# Altium PCB MB1520.PcbDoc (part 2 of 7)
Units mm, origin at the board's own origin, x right, y up, seen from the top; angles counter-clockwise.
Board outline 159 x 88 mm, 6 copper layers (Top Layer, Signal Layer 1, Signal Layer 2, Signal Layer 3, Signal Layer 4, Bottom Layer), stack 1.572 mm thick; 473 components, 377 nets, 1832 pads, 1378 vias.
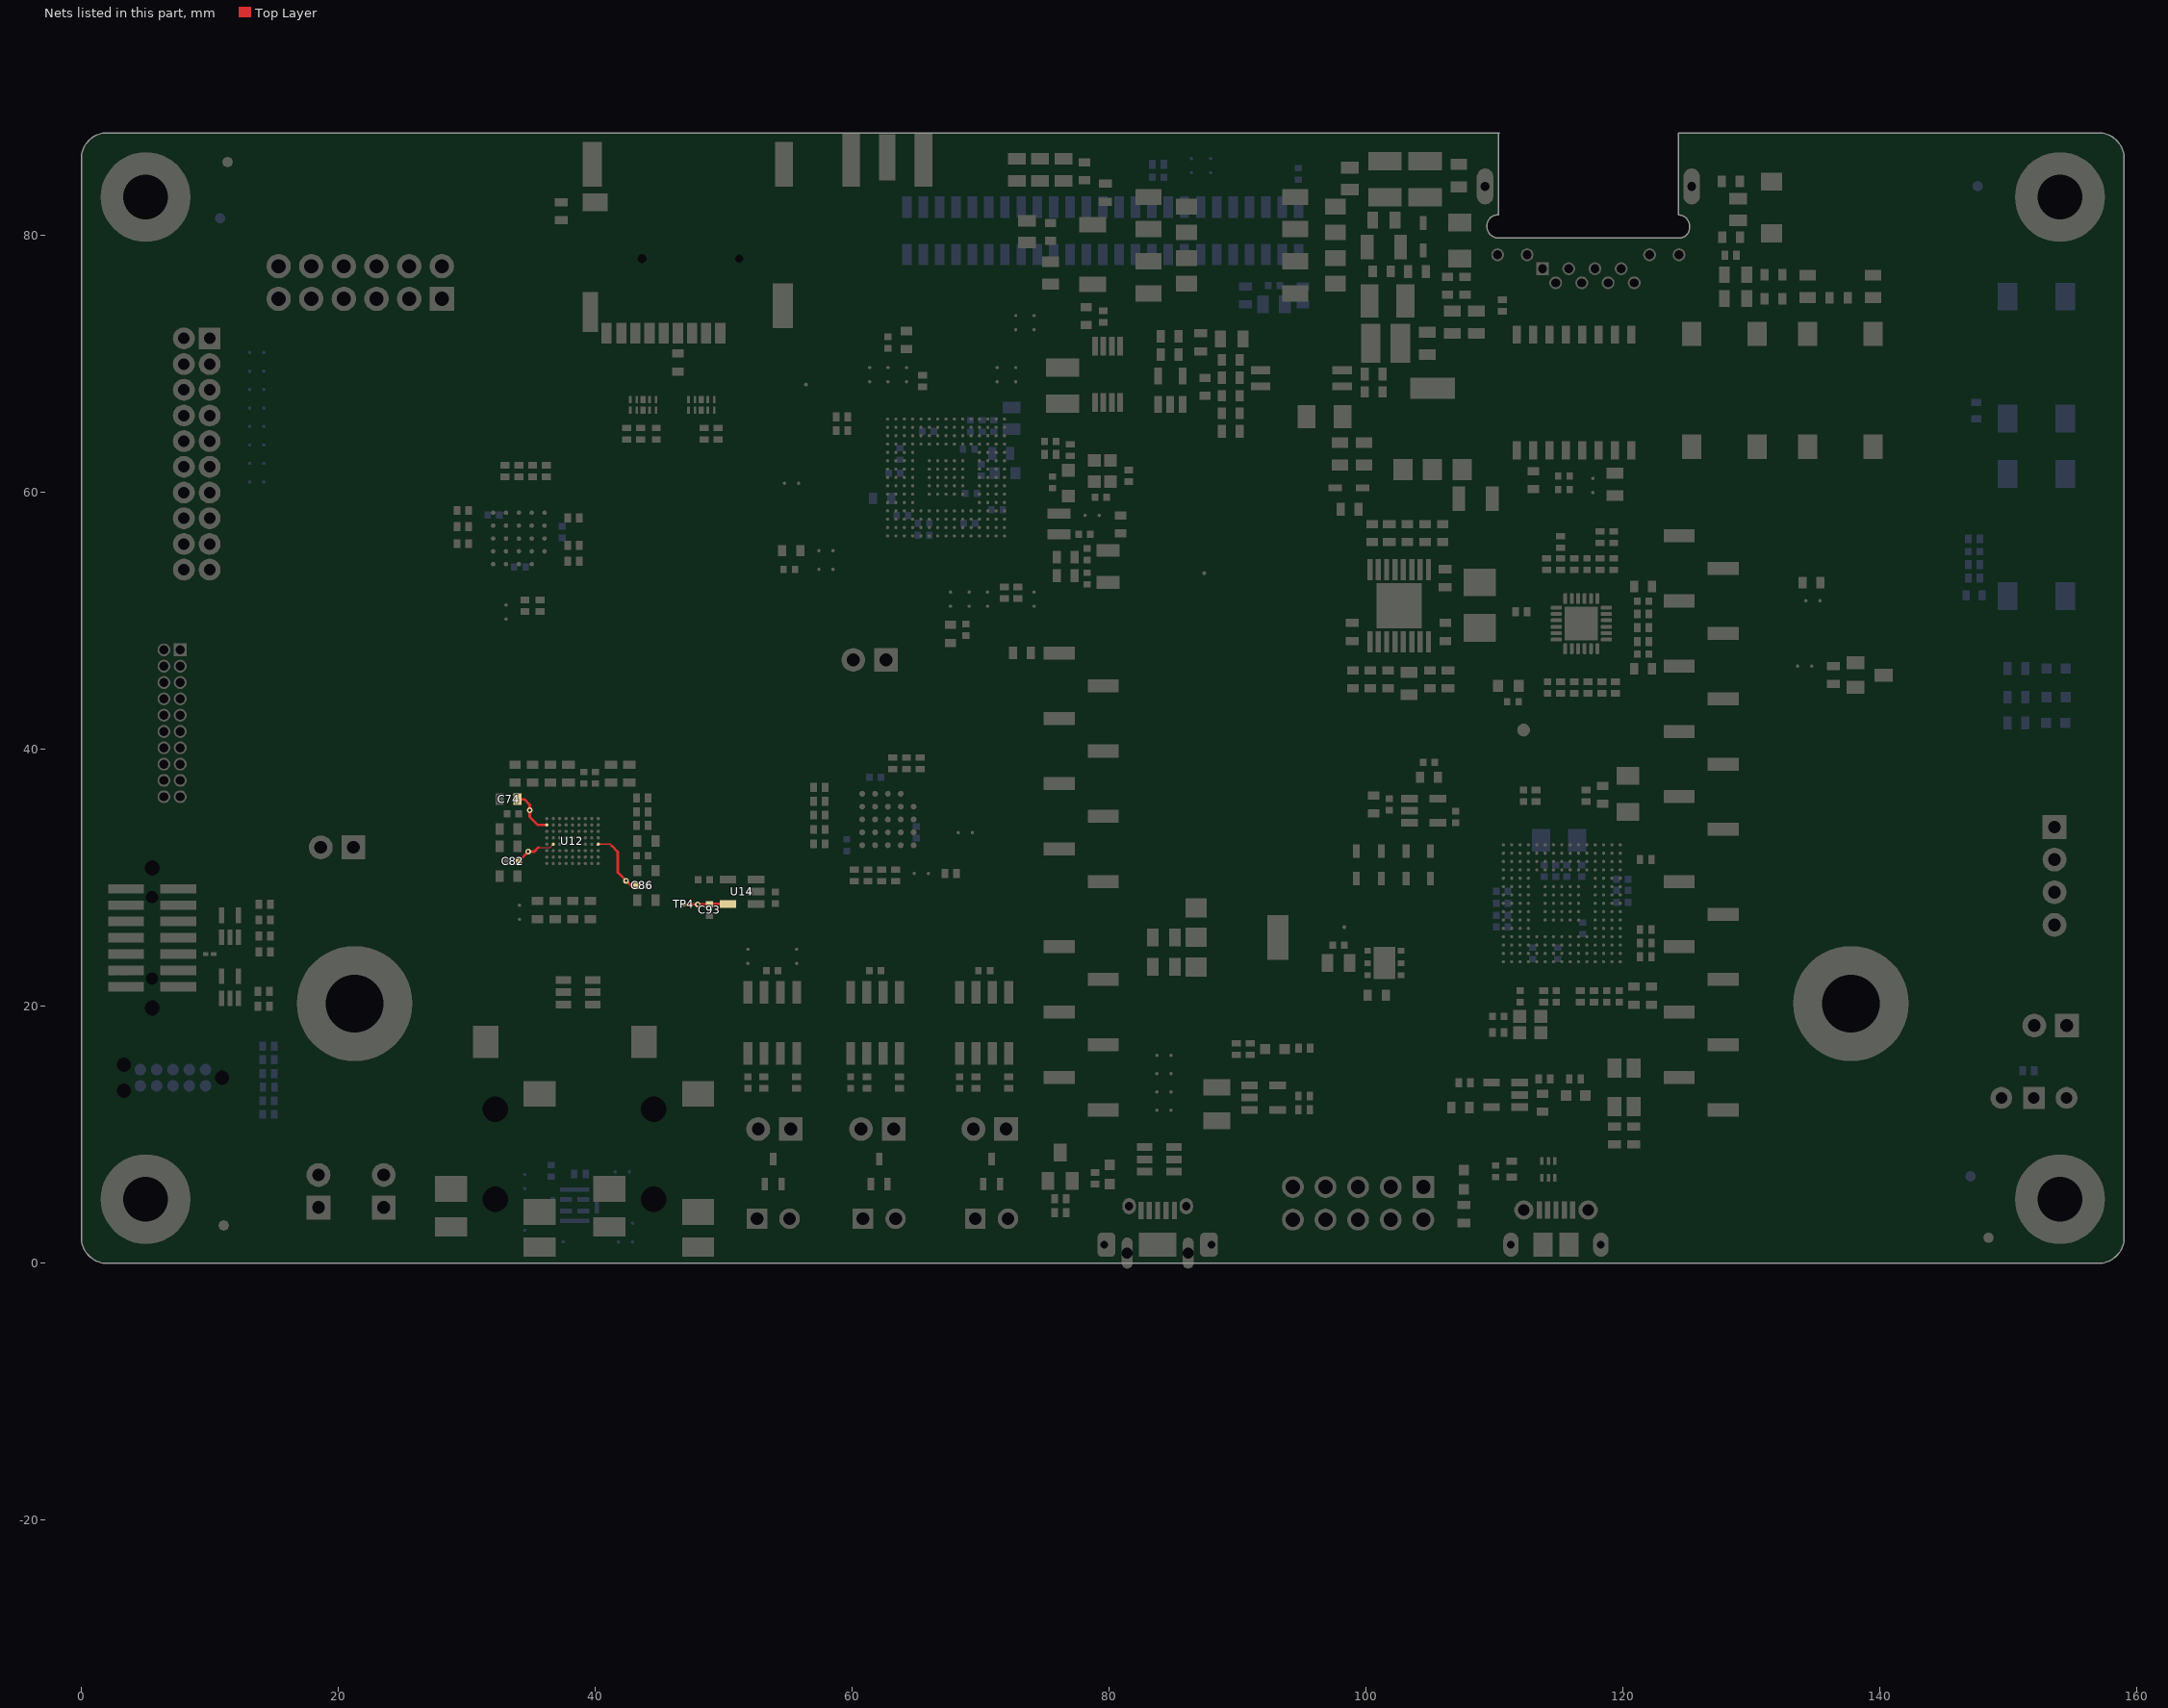
[diagram p6: the nets of this part, all layers, seen from the top]

## Footprints (in the part's own frame and the unit in brackets; to place one, negate y for a bottom-side part, rotate by r counter-clockwise, add the part's x,y. Pads: shape width x height; smd on the part's side, far side on the other; paste and mask are expansions set on the pad) (continued)
CON_SAMTEC_SSW-108-22-X-S-VS [mil]
  rect 40x95 smd mask+1.97: 1(350,67.5) 2(250,-67.5) 3(150,67.5) 4(50,-67.5) 5(-50,67.5) 6(-150,-67.5) 7(-250,67.48) 8(-350,-67.48)
  silkscreen extent -410,-48 410,48, body extent -410,-101 410,102, height 385
CON_SAMTEC_SSW-110-22-X-S-VS [mil]
  rect 40x95 smd mask+1.97: 1(450,67.5) 2(350,-67.5) 3(250,67.5) 4(150,-67.5) 5(50,67.5) 6(-50,-67.5) 7(-150,67.48) 8(-250,-67.48) 9(-350,67.48) 10(-450,-67.48)
  silkscreen extent -510,-48 510,48, body extent -510,-101 510,102, height 385
CON_SAMTEC_TSW-102-07-G-S [mm]
  rect 1.85x1.85 / inner round 1.85 / far side rect 1.85x1.85 hole 1 mask+0.05: 1(-1.27,0)
  round 1.85 hole 1 mask+0.05: 2(1.27,0)
  silkscreen extent -2.58,-1.3 2.58,1.3, body extent -2.67,-1.3 2.58,1.3, height 8.38
CON_SAMTEC_TSW-104-07-G-S [mm]
  rect 1.85x1.85 / inner round 1.85 / far side rect 1.85x1.85 hole 1 mask+0.05: 1(-3.81,0)
  round 1.85 hole 1 mask+0.05: 2(-1.27,0) 3(1.27,0) 4(3.81,0)
  silkscreen extent -5.12,-1.3 5.12,1.3, body extent -5.21,-1.37 5.18,1.37, height 8.38
CON_STDC14_Receiver_MEDIUM_WITH_MIPI10_3D [mm] "compatible with FTSH-105-01-L-DV,-K and FTSH-107-01-L-DV,-K,-A,-P,-ES"
  round 0 hole 1.19 unplated mask+0.05: 0(-5.445,0) 0(5.445,0)
  round 0 hole 0.97 unplated mask+0.05: 0(-3.175,0) 0(3.175,0)
  rect 0.74x2.79 smd mask+0.05: 1(-3.81,-2.032) 2(-3.81,2.032) 3(-2.54,-2.032) 4(-2.54,2.032) 5(-1.27,-2.032) 6(-1.27,2.032) 7(0,-2.032) 8(0,2.032) 9(1.27,-2.032) 10(1.27,2.032) 11(2.54,-2.032) 12(2.54,2.032) 13(3.81,-2.032) 14(3.81,2.032)
  silkscreen extent -6.3,-4.38 6.3,3.6, body extent -6.3,-2.92 6.3,2.92, height 6.6
CON_TAG-C_TC2050-IDC-NL [mm]
  round 0.9 smd paste+0 mask+0.05: 1(-2.54,-0.635) 2(-1.27,-0.635) 3(0,-0.635) 4(1.27,-0.635) 5(2.54,-0.635) 6(2.54,0.635) 7(1.27,0.635) 8(0,0.635) 9(-1.27,0.635) 10(-2.54,0.635)
  round 0 hole 1.1 unplated mask+0.05: 11(-3.81,0) 12(3.81,-1.015) 13(3.81,1.015)
  Multi-Layer keep-out circle w0.01: c3.81,-1.015 r0.75
  Multi-Layer keep-out circle w0.01: c3.81,1.015 r0.75
  Multi-Layer keep-out circle w0.01: c-3.81,0 r0.75
  silkscreen extent -6.22,-3.4 6.22,3.33, body extent -6.28,-3.46 6.28,3.39, height 13
CON_USBMICROAB_MOLEX_47590-0001_H3 [mm]
  rect 0.4x1.35 smd mask+0.05: 1(1.3,4.125) 2(0.65,4.125) 3(0,4.125) 4(-0.65,4.125) 5(-1.3,4.125)
  oval 1.05x1.25 hole 0.65 slot 0.85 at 90 deg mask+0.05: 6(-2.225,4.45) 7(2.225,4.45)
  rrect50% 1.375x1.9 hole 0.6 slot 1.3 at 90 deg copper offset 0.188,0 mask+0.05: 8(-4.175,1.45)
  rrect50% 1.375x1.9 hole 0.6 slot 1.3 at 90 deg copper offset -0.188,0 mask+0.05: 9(4.175,1.45)
  rect 2.9x1.9 smd mask+0.05: 10(0,1.45)
  oval 0.85x2.425 hole 0.85 slot 2.425 at 90 deg unplated mask+0.1: 11(-2.375,0.8) 12(2.375,0.8)
  silkscreen extent -4.1,-1.3 4.1,4.3, body extent -4.32,-1.36 4.33,4.6, height 3
CON_USBMICROB_MOLEX_105017-0001_H2P90 [mm]
  rect 0.4x1.35 smd mask+0.05: 1(-1.3,4.15) 2(-0.65,4.15) 3(0,4.15) 4(0.65,4.15) 5(1.3,4.15)
  round 1.5 hole 0.9 mask+0.05: 6(-2.5,4.15) 7(2.5,4.15)
  oval 1.2x1.9 hole 0.6 slot 1.3 at 90 deg mask+0.05: 8(3.5,1.45) 9(-3.5,1.45)
  rect 1.5x1.9 smd mask+0.05: 10(-1,1.45) 11(1,1.45)
  Top Layer region: -3.5,2.4 -2.3,2.4 -2.3,0.5 -3.5,0.5 -3.5,2.4
  Top Layer region: 2.3,2.4 3.5,2.4 3.5,0.5 2.3,0.5 2.3,2.4
  silkscreen extent -4,-0.7 4,4.6, body extent -4.1,-1.15 4.1,4.66, height 2.9
CPOL_VISHAY_TANTAL-595D_1407_H220 [mm]
  rect 1.3x2.1 smd mask+0.05: 1(-1.3,0) 2(1.3,0)
  silkscreen extent -2.23,-1.32 0.53,1.32, body extent -1.85,-1.05 1.85,1.05, height 2.21
CRY_NX3215SA_2P [mm]
  rect 1x1.8 smd mask+0.05: 1(-1.25,0) 2(1.25,0)
  silkscreen extent -0.63,-0.8 0.63,0.8, body extent -1.65,-0.8 1.65,0.8, height 0.9
DIO_SMA_1A_2K [mm]
  rect 1.4x1.64 smd mask+0.05: 1(2.015,0) 2(-2.015,0)
  silkscreen extent -2.3,-1.45 2.3,1.45, body extent -2.75,-1.45 2.75,1.45, height 2.7
DIO_SMA_DO214-AC_1A_2K [mm]
  rect 2.15x2.5 smd mask+0.05: 1(1.775,0) 2(-1.775,0)
  silkscreen extent -2.25,-1.4 2.25,1.4, body extent -2.75,-1.4 2.75,1.4, height 2.6
DIO_SMB-FLAT_1A_2K [mm]
  rect 1.2x2.07 smd mask+0.05: 1(2.32,0) 2(-2.32,0)
  silkscreen extent -2.3,-2 2.3,2, body extent -2.8,-2 2.8,2, height 1.11
DIO_SOD323 [mm]
  rect 1.06x0.54 smd mask+0.05: 1(-1.07,0) 2(1.07,0)
  silkscreen extent -0.9,-0.72 0.9,0.72, body extent -1.3,-0.78 1.3,0.78, height 1.17
DIO_SOD323_1A_2K [mm]
  rect 1.06x0.54 smd mask+0.05: 1(-1.07,0) 2(1.07,0)
  silkscreen extent -0.9,-0.72 0.9,0.72, body extent -1.3,-0.78 1.3,0.78, height 1.17
DIO_SOT323 [mm]
  rect 0.5x0.95 smd mask+0.05: 1(-0.65,-0.975) 2(0.65,-0.975) 3(0,0.975)
  silkscreen extent -1.15,-0.67 1.15,0.67, body extent -1.15,-1.12 1.15,1.12, height 1.1
ESD_QFN2_1P6X1_P125 [mm]
  rect 0.55x0.8 smd mask+0.05: 1(-0.625,0) 2(0.625,0)
  silkscreen extent -1,-0.55 0.85,0.55, body extent -0.85,-0.55 0.85,0.55, height 0.61
ESD_QFN-6L_1P7X1P5_P050 [mm]
  rect 0.25x0.6 smd mask+0.05: 1(-0.5,-0.65) 2(0,-0.65) 3(0.5,-0.65) 4(0.5,0.65) 5(0,0.65) 6(-0.5,0.65)
  silkscreen extent -0.9,-0.8 0.9,0.8, body extent -0.9,-0.8 0.9,0.8, height 0.56
ESD_SOT23-6L [mm]
  rect 0.6x1.2 smd mask+0.05: 1(-0.95,-1.15) 2(0,-1.15) 3(0.95,-1.15) 4(0.95,1.15) 5(0,1.15) 6(-0.95,1.15)
  silkscreen extent -1.53,-0.87 1.53,0.87, body extent -1.52,-1.5 1.52,1.5, height 1.45
ESD_SOT323-5L [mm]
  rect 0.4x1.2 smd mask+0.05: 1(-0.65,-0.85) 2(0,-0.85) 3(0.65,-0.85) 4(0.65,0.85) 5(-0.65,0.85)
  silkscreen extent -1.22,-1.21 1.22,0.77, body extent -1.15,-1.05 1.15,1.05, height 1.1
ESD_ST0201 [mm]
  rect 0.425x0.33 smd mask+0.05: 1(-0.312,0) 2(0.312,0)
  silkscreen extent -0.55,-0.3 0.33,0.3, body extent -0.34,-0.18 0.34,0.18, height 0.34
ESD_UQFN-10L_2P5X1_P050 [mm]
  rect 0.2x0.58 smd mask+0.05: 1(-1,-0.41) 2(-0.5,-0.41) 4(0.5,-0.41) 5(1,-0.41) 6(1,0.41) 7(0.5,0.41) 9(-0.5,0.41) 10(-1,0.41)
  rect 0.4x0.58 smd mask+0.05: 3(0,-0.41) 8(0,0.41)
  silkscreen extent -1.38,-0.63 1.38,0.63, body extent -1.3,-0.55 1.3,0.55, height 0.51
ICC_BGA24_5X5-BALL-ARRAY_6X8_P1 [mm]
  round 0.45 smd mask+0.05: A2(-1,2) A3(0,2) A4(1,2) A5(2,2) B1(-2,1) B2(-1,1) B3(0,1) B4(1,1) B5(2,1) C1(-2,0) C2(-1,0) C3(0,0) C4(1,0) C5(2,0) D1(-2,-1) D2(-1,-1) D3(0,-1) D4(1,-1) D5(2,-1) E1(-2,-2) E2(-1,-2) E3(0,-2) E4(1,-2) E5(2,-2)
  silkscreen extent -3.05,-4.05 3.05,4.05, body extent -3.05,-4.05 3.05,4.05, height 1.2
ICC_DFN6-EPAD_3X3_P095 [mm]
  rect 0.45x0.5 smd mask+0.05: 1(-0.95,-1.3) 2(0,-1.3) 3(0.95,-1.3) 4(0.95,1.3) 5(0,1.3) 6(-0.95,1.3)
  rect 2.5x1.7 smd mask+0.05: EP(0,0)
  silkscreen extent -1.55,-1.55 1.55,1.55, body extent -1.55,-1.55 1.55,1.55, height 1
ICC_FBGA24_5X5-BALL-ARRAY_6X8_P1 [mm] "MCD-01824"
  round 0.35 smd mask+0.05: A2(-1,2) A3(0,2) A4(1,2) A5(2,2) B1(-2,1) B2(-1,1) B3(0,1) B4(1,1) B5(2,1) C1(-2,0) C2(-1,0) C3(0,0) C4(1,0) C5(2,0) D1(-2,-1) D2(-1,-1) D3(0,-1) D4(1,-1) D5(2,-1) E1(-2,-2) E2(-1,-2) E3(0,-2) E4(1,-2) E5(2,-2)
  silkscreen extent -3.18,-4.05 3.05,4.18, body extent -3.05,-4.05 3.05,4.05, height 1
ICC_HTSSOP16-EPAD_5X4P4_P065 [mm]
  rect 0.4x1.65 smd mask+0.05: 1(-2.275,-2.8) 2(-1.625,-2.8) 3(-0.975,-2.8) 4(-0.325,-2.8) 5(0.325,-2.8) 6(0.975,-2.8) 7(1.625,-2.8) 8(2.275,-2.8) 9(2.275,2.8) 10(1.625,2.8) 11(0.975,2.8) 12(0.325,2.8) 13(-0.325,2.8) 14(-0.975,2.8) 15(-1.625,2.8) 16(-2.275,2.8)
  rect 3.5x3.5 smd mask+0.05: EP(0,0)
  silkscreen extent -2.6,-2.25 2.6,2.25, body extent -2.56,-3.2 2.55,3.2, height 1.2
ICC_SO8_5X4_P127 [mm]
  rect 0.7x1.75 smd mask+0.05: 1(-1.905,-2.375) 2(-0.635,-2.375) 3(0.635,-2.375) 4(1.905,-2.375) 5(1.905,2.375) 6(0.635,2.375) 7(-0.635,2.375) 8(-1.905,2.375)
  silkscreen extent -2.73,-3.25 2.58,2, body extent -2.57,-3 2.57,3, height 1.75
ICC_UFBGA201_176+25_10X10_P065 [mm] "IPC"
  round 0.25 smd mask+0.05: A1(-4.55,4.55) A2(-3.9,4.55) A3(-3.25,4.55) A4(-2.6,4.55) A5(-1.95,4.55) A6(-1.3,4.55) A7(-0.65,4.55) A8(0,4.55) A9(0.65,4.55) A10(1.3,4.55) A11(1.95,4.55) A12(2.6,4.55) A13(3.25,4.55) A14(3.9,4.55) A15(4.55,4.55) B1(-4.55,3.9) B2(-3.9,3.9) B3(-3.25,3.9) B4(-2.6,3.9) B5(-1.95,3.9) B6(-1.3,3.9) B7(-0.65,3.9) B8(0,3.9) B9(0.65,3.9) B10(1.3,3.9) B11(1.95,3.9) B12(2.6,3.9) B13(3.25,3.9) B14(3.9,3.9) B15(4.55,3.9) C1(-4.55,3.25) C2(-3.9,3.25) C3(-3.25,3.25) C4(-2.6,3.25) C5(-1.95,3.25) C6(-1.3,3.25) C7(-0.65,3.25) C8(0,3.25) C9(0.65,3.25) C10(1.3,3.25) C11(1.95,3.25) C12(2.6,3.25) C13(3.25,3.25) C14(3.9,3.25) C15(4.55,3.25) D1(-4.55,2.6) D2(-3.9,2.6) D3(-3.25,2.6) D4(-2.6,2.6) D5(-1.95,2.6) D6(-1.3,2.6) D7(-0.65,2.6) D8(0,2.6) D9(0.65,2.6) D10(1.3,2.6) D11(1.95,2.6) D12(2.6,2.6) D13(3.25,2.6) D14(3.9,2.6) D15(4.55,2.6) E1(-4.55,1.95) E2(-3.9,1.95) E3(-3.25,1.95) E4(-2.6,1.95) E12(2.6,1.95) E13(3.25,1.95) E14(3.9,1.95) E15(4.55,1.95) F1(-4.55,1.3) F2(-3.9,1.3) F3(-3.25,1.3) F4(-2.6,1.3) F6(-1.3,1.3) F7(-0.65,1.3) F8(0,1.3) F9(0.65,1.3) F10(1.3,1.3) F12(2.6,1.3) F13(3.25,1.3) F14(3.9,1.3) F15(4.55,1.3) G1(-4.55,0.65) G2(-3.9,0.65) G3(-3.25,0.65) G4(-2.6,0.65) G6(-1.3,0.65) G7(-0.65,0.65) G8(0,0.65) G9(0.65,0.65) G10(1.3,0.65) G12(2.6,0.65) G13(3.25,0.65) G14(3.9,0.65) G15(4.55,0.65) H1(-4.55,0) H2(-3.9,0) H3(-3.25,0) H4(-2.6,0) H6(-1.3,0) H7(-0.65,0) H8(0,0) H9(0.65,0) H10(1.3,0) H12(2.6,0) H13(3.25,0) H14(3.9,0) H15(4.55,0) J1(-4.55,-0.65) J2(-3.9,-0.65) J3(-3.25,-0.65) J4(-2.6,-0.65) J6(-1.3,-0.65) J7(-0.65,-0.65) J8(0,-0.65) J9(0.65,-0.65) J10(1.3,-0.65) J12(2.6,-0.65) J13(3.25,-0.65) J14(3.9,-0.65) J15(4.55,-0.65) K1(-4.55,-1.3) K2(-3.9,-1.3) K3(-3.25,-1.3) K4(-2.6,-1.3) K6(-1.3,-1.3) K7(-0.65,-1.3) K8(0,-1.3) K9(0.65,-1.3) K10(1.3,-1.3) K12(2.6,-1.3) K13(3.25,-1.3) K14(3.9,-1.3) K15(4.55,-1.3) L1(-4.55,-1.95) L2(-3.9,-1.95) L3(-3.25,-1.95) L4(-2.6,-1.95) L12(2.6,-1.95) L13(3.25,-1.95) L14(3.9,-1.95) L15(4.55,-1.95) M1(-4.55,-2.6) M2(-3.9,-2.6) M3(-3.25,-2.6) M4(-2.6,-2.6) M5(-1.95,-2.6) M6(-1.3,-2.6) M7(-0.65,-2.6) M8(0,-2.6) M9(0.65,-2.6) M10(1.3,-2.6) M11(1.95,-2.6) M12(2.6,-2.6) M13(3.25,-2.6) M14(3.9,-2.6) M15(4.55,-2.6) N1(-4.55,-3.25) N2(-3.9,-3.25) N3(-3.25,-3.25) N4(-2.6,-3.25) N5(-1.95,-3.25) N6(-1.3,-3.25) N7(-0.65,-3.25) N8(0,-3.25) N9(0.65,-3.25) N10(1.3,-3.25) N11(1.95,-3.25) N12(2.6,-3.25) N13(3.25,-3.25) N14(3.9,-3.25) N15(4.55,-3.25) P1(-4.55,-3.9) P2(-3.9,-3.9) P3(-3.25,-3.9) P4(-2.6,-3.9) P5(-1.95,-3.9) P6(-1.3,-3.9) P7(-0.65,-3.9) P8(0,-3.9) P9(0.65,-3.9) P10(1.3,-3.9) P11(1.95,-3.9) P12(2.6,-3.9) P13(3.25,-3.9) P14(3.9,-3.9) P15(4.55,-3.9) R1(-4.55,-4.55) R2(-3.9,-4.55) R3(-3.25,-4.55) R4(-2.6,-4.55) R5(-1.95,-4.55) R6(-1.3,-4.55) R7(-0.65,-4.55) R8(0,-4.55) R9(0.65,-4.55) R10(1.3,-4.55) R11(1.95,-4.55) R12(2.6,-4.55) R13(3.25,-4.55) R14(3.9,-4.55) R15(4.55,-4.55)
  silkscreen extent -5.22,-5.07 5.07,5.23, body extent -5.07,-5.07 5.07,5.07, height 0.61
ICC_VQFN24-EPAD_4X4_P050 [mm]
  rrect50% 0.85x0.3 smd mask+0.05: 1(-1.95,1.25) 2(-1.95,0.75) 3(-1.95,0.25) 4(-1.95,-0.25) 5(-1.95,-0.75) 6(-1.95,-1.25) 13(1.95,-1.25) 14(1.95,-0.75) 15(1.95,-0.25) 16(1.95,0.25) 17(1.95,0.75) 18(1.95,1.25)
  rrect50% 0.3x0.85 smd mask+0.05: 7(-1.25,-1.95) 8(-0.75,-1.95) 9(-0.25,-1.95) 10(0.25,-1.95) 11(0.75,-1.95) 12(1.25,-1.95) 19(1.25,1.95) 20(0.75,1.95) 21(0.25,1.95) 22(-0.25,1.95) 23(-0.75,1.95) 24(-1.25,1.95)
  rect 2.6x2.6 smd paste-10 mask+0.05: EP(0,0)
  silkscreen extent -2,-2 2,2, body extent -2.05,-2.05 2.05,2.05, height 1.1
ICC_VSSOP8_DGK_S-PDSO-G8_3X3_P065 [mm]
  rect 0.45x1.45 smd mask+0.05: 1(-0.975,-2.2) 2(-0.325,-2.2) 3(0.325,-2.2) 4(0.975,-2.2) 5(0.975,2.2) 6(0.325,2.2) 7(-0.325,2.2) 8(-0.975,2.2)
  silkscreen extent -1.55,-1.55 1.55,1.55, body extent -1.55,-2.45 1.55,2.45, height 1.11
ICC_W-CSP-BGA72_4P511X4P023_P050 [mm]
  round 0.25 smd mask+0.05: A1(-2,1.75) A2(-1.5,1.75) A3(-1,1.75) A4(-0.5,1.75) A5(0,1.75) A6(0.5,1.75) A7(1,1.75) A8(1.5,1.75) A9(2,1.75) B1(-2,1.25) B2(-1.5,1.25) B3(-1,1.25) B4(-0.5,1.25) B5(0,1.25) B6(0.5,1.25) B7(1,1.25) B8(1.5,1.25) B9(2,1.25) C1(-2,0.75) C2(-1.5,0.75) C3(-1,0.75) C4(-0.5,0.75) C5(0,0.75) C6(0.5,0.75) C7(1,0.75) C8(1.5,0.75) C9(2,0.75) D1(-2,0.25) D2(-1.5,0.25) D3(-1,0.25) D4(-0.5,0.25) D5(0,0.25) D6(0.5,0.25) D7(1,0.25) D8(1.5,0.25) D9(2,0.25) E1(-2,-0.25) E2(-1.5,-0.25) E3(-1,-0.25) E4(-0.5,-0.25) E5(0,-0.25) E6(0.5,-0.25) E7(1,-0.25) E8(1.5,-0.25) E9(2,-0.25) F1(-2,-0.75) F2(-1.5,-0.75) F3(-1,-0.75) F4(-0.5,-0.75) F5(0,-0.75) F6(0.5,-0.75) F7(1,-0.75) F8(1.5,-0.75) F9(2,-0.75) G1(-2,-1.25) G2(-1.5,-1.25) G3(-1,-1.25) G4(-0.5,-1.25) G5(0,-1.25) G6(0.5,-1.25) G7(1,-1.25) G8(1.5,-1.25) G9(2,-1.25) H1(-2,-1.75) H2(-1.5,-1.75) H3(-1,-1.75) H4(-0.5,-1.75) H5(0,-1.75) H6(0.5,-1.75) H7(1,-1.75) H8(1.5,-1.75) H9(2,-1.75)
  silkscreen extent -2.42,-2.03 2.28,2.17, body extent -2.28,-2.04 2.28,2.04, height 0.78
IND_2016_MURATA_LQM2MPN2R2NG0 [mm]
  rect 0.8x1.8 smd mask+0.05: 1(-0.8,0) 2(0.8,0)
  silkscreen extent -0.28,-0.87 0.28,0.87, body extent -1.07,-0.87 1.08,0.87, height 1
IND_POWER_COILCRAFT_ME3220 [mm]
  rect 1.52x3.05 smd mask+0.05: 1(-1.145,0) 2(1.145,0)
  silkscreen extent -0.25,-1.4 0.25,1.4, body extent -1.75,-1.4 1.75,1.4, height 2.4
IND_TAIYO-YUDEN_FBMJ1608 [mm]
  rect 1x1 smd mask+0.05: 1(-1,0) 2(1,0)
  silkscreen extent -0.38,-0.5 0.38,0.5, body extent -0.9,-0.5 0.9,0.5, height 1
L0603 [mm]
  rect 0.8x0.95 smd mask+0.05: 1(-0.8,0) 2(0.8,0)
  silkscreen extent -1.33,-0.6 1.33,0.6, body extent -0.87,-0.47 0.87,0.47, height 0.95
LED_0603_GREEN [mm]
  rect 0.8x0.8 smd mask+0.05: 1(-0.75,0) 2(0.75,0)
  silkscreen extent -0.25,-0.4 1.25,0.4, body extent -0.8,-0.4 0.8,0.4, height 0.6
LED_0603_RED [mm]
  rect 0.8x0.8 smd mask+0.05: 1(-0.75,0) 2(0.75,0)
  silkscreen extent -0.25,-0.4 1.25,0.4, body extent -0.8,-0.4 0.8,0.4, height 0.6
LED_0603_VISHAY_VLMS1300-GS08_RED_1A2K_H0P8 [mm]
  rect 0.8x0.8 smd mask+0.05: 1(-0.75,0) 2(0.75,0)
  silkscreen extent -0.85,-0.53 1.28,0.53, body extent -0.85,-0.45 0.85,0.45, height 0.8
LED_0603_VISHAY_VLMTG1300-GS08_GREEN_1A2K_H0P8 [mm]
  rect 0.8x0.8 smd mask+0.05: 1(-0.75,0) 2(0.75,0)
  silkscreen extent -0.85,-0.53 1.28,0.53, body extent -0.85,-0.45 0.85,0.45, height 0.8
LED_BI-GR_HSMF-A201-A00J1 [mm]
  rect 1.1x1.5 smd mask+0.05: 1(-0.75,-1.5) 2(-0.75,1.5) 3(0.75,1.5) 4(0.75,-1.5)
  silkscreen extent -1.65,-1.85 1.65,1.85, body extent -1.5,-1.85 1.5,1.85, height 2.1
LOGO_ETIQUETTE [mm]
  silkscreen extent 0,0 27,10
MIC_HCLGA_3X4X1_4LD [mm]
  rect 0.4x0.95 smd paste+0 mask+0.05: 1(0.45,-0.675) 2(0.45,0.675) 3(-0.45,0.675) 4(-0.45,-0.675)
  rect 1.3x0.35 smd paste+0 mask+0.05: 5(0,-1.725) 6(0,1.725)
  rect 0.35x2.3 smd paste+0 mask+0.05: 7(1.225,0) 8(-1.225,0)
  silkscreen extent -1.55,-2.05 1.55,2.05, body extent -1.45,-1.95 1.45,1.95, height 1.03
MIRE_PLACE_SMD_0P8MM [mm]
  round 0.8 smd paste-10 mask+0.2: 1(0,0)
  Top Layer keep-out circle w0.01: c0,0 r0.804
MOD_LCD_MB1046B__CON_SAMTEC_FLE-125-01-G-DV [mm]
  rect 0.74x1.675 smd mask+0.05: 1(15.24,-9.469) 2(15.24,-5.783) 3(13.97,-9.469) 4(13.97,-5.783) 5(12.7,-9.469) 6(12.7,-5.783) 7(11.43,-9.469) 8(11.43,-5.783) 9(10.16,-9.469) 10(10.16,-5.783) 11(8.89,-9.469) 12(8.89,-5.783) 13(7.62,-9.469) 14(7.62,-5.783) 15(6.35,-9.469) 16(6.35,-5.783) 17(5.08,-9.469) 18(5.08,-5.783) 19(3.81,-9.469) 20(3.81,-5.783) 21(2.54,-9.469) 22(2.54,-5.783) 23(1.27,-9.469) 24(1.27,-5.783) 25(0,-9.469) 26(0,-5.783) 27(-1.27,-9.469) 28(-1.27,-5.783) 29(-2.54,-9.469) 30(-2.54,-5.783) 31(-3.81,-9.469) 32(-3.81,-5.783) 33(-5.08,-9.469) 34(-5.08,-5.783) 35(-6.35,-9.469) 36(-6.35,-5.783) 37(-7.62,-9.469) 38(-7.62,-5.783) 39(-8.89,-9.469) 40(-8.89,-5.783) 41(-10.16,-9.469) 42(-10.16,-5.783) 43(-11.43,-9.469) 44(-11.43,-5.783) 45(-12.7,-9.469) 46(-12.7,-5.783) 47(-13.97,-9.469) 48(-13.97,-5.783) 49(-15.24,-9.469) 50(-15.24,-5.783)
  round 9 hole 4.5 mask+0.05: PTH1(-58.24,-67.77) PTH2(58.24,-67.77)
  silkscreen extent -63.5,-73 63.5,0, body extent -63.5,-73 63.5,0, height 10.2
MOS_SOT23 [mm]
  rect 1x1.4 smd mask+0.05: 1(-0.95,-1.1) 2(0.95,-1.1) 3(0,1.1)
  silkscreen extent -1.63,-0.82 1.63,0.82, body extent -1.56,-1.25 1.56,1.25, height 1.1
MOS_SOT23-5L [mm]
  rect 0.6x1.3 smd mask+0.05: 1(-0.95,-1.1) 2(0,-1.1) 3(0.95,-1.1) 4(0.95,1.1) 5(-0.95,1.1)
  silkscreen extent -1.6,-0.95 1.6,0.97, body extent -1.52,-1.25 1.52,1.25, height 1.45
MOS_SOT223-TAB [mm]
  rect 1.5x1.65 smd mask+0.05: 1(-2.3,-3.175) 2(0,-3.175) 3(2.3,-3.175)
  rect 3.5x1.65 smd mask+0.05: 4(0,3.175)
  silkscreen extent -3.35,-2.15 3.35,2.12, body extent -3.35,-3.48 3.35,3.48, height 1.8
NPN_SOT23 [mm]
  rect 1x1.4 smd mask+0.05: 1(-0.95,-1.1) 2(0.95,-1.1) 3(0,1.1)
  silkscreen extent -1.63,-0.82 1.63,0.82, body extent -1.56,-1.25 1.56,1.25, height 1.1
OPT_MINI-FLAT_FAIRCHILD_HMHA2801A [mm]
  rect 0.61x1.52 smd mask+0.05: 1(0.635,3.175) 2(-0.635,3.175) 3(-0.635,-3.175) 4(0.635,-3.175)
  silkscreen extent -1.35,-2.2 1.35,2.2, body extent -1.35,-3.5 1.35,3.5, height 2.39
OSC_NDK_NZ2520SB_4P [mm]
  rect 1x1 smd mask+0.05: 1(-0.825,-0.625) 2(0.825,-0.625) 3(0.825,0.625) 4(-0.825,0.625)
  silkscreen extent -1.43,-1.22 1.2,1.05, body extent -1.3,-1.05 1.3,1.05, height 0.91
PTH_350_700 [mm]
  round 7 hole 3.5 mask+0.05: 1(0,0)
  silkscreen extent -3.75,-3.75 3.75,3.75
R0402 [mm]
  rect 0.51x0.7 smd mask+0.05: 1(-0.45,0) 2(0.45,0)
  silkscreen extent 0,-0.3 0,0.3, body extent -0.52,-0.3 0.52,0.3, height 0.4
R0603 [mm]
  rect 0.64x1 smd mask+0.05: 1(-0.7,0) 2(0.7,0)
  silkscreen extent -1.05,-0.58 1.05,0.58, body extent -0.9,-0.5 0.9,0.5, height 0.56
R0805 [mm]
  rect 0.85x1.3 smd mask+0.05: 1(-0.875,0) 2(0.875,0)
  silkscreen extent -0.33,-0.67 0.33,0.67, body extent -1.05,-0.68 1.05,0.68, height 0.65
R1206_H0P55 [mm]
  rect 1x1.9 smd mask+0.05: 1(-1.3,0) 2(1.3,0)
  silkscreen extent -0.67,-0.85 0.67,0.85, body extent -1.6,-0.85 1.6,0.85, height 0.65
REG_SOT23-5L [mm]
  rect 0.6x1.3 smd mask+0.05: 1(-0.95,-1.1) 2(0,-1.1) 3(0.95,-1.1) 4(0.95,1.1) 5(-0.95,1.1)
  silkscreen extent -1.6,-0.95 1.6,0.97, body extent -1.52,-1.25 1.52,1.25, height 1.1
REG_SOT223-TAB [mm]
  rect 1.5x1.65 smd mask+0.05: 1(-2.3,-3.175) 2(0,-3.175) 3(2.3,-3.175)
  rect 3.5x1.65 smd mask+0.05: 4(0,3.175)
  silkscreen extent -3.35,-2.15 3.35,2.12, body extent -3.35,-3.48 3.35,3.48, height 1.8
SOLDER-BRIDGE_R0603-0R [mil]
  round 10 smd paste-393.7: 1(-19.69,0) 2(23.62,0)
  Top Layer region: -5.91,19.68 13.78,0 -5.91,-19.68 47.24,-19.68 47.24,19.68 -5.91,19.68
  Top Layer region: -47.24,-19.68 -47.24,19.68 -15.75,19.68 3.94,0 -15.75,-19.68 -47.24,-19.68
  silkscreen extent -50,-23 50,23, body extent -36,-20 36,20, height 22
SWI_EAO_09-03290-01_EXTENDED_STRAIGHT_BLACK [mm]
  rect 1.7x1.7 hole 0.9 mask+0.05: 1(0,0)
  round 1.7 hole 0.9 mask+0.05: 2(0,-2.54) 3(0,2.54)
  silkscreen extent -1.25,-5 1.25,5, body extent -1.25,-5 1.25,5, height 7.9
SWI_WEALTHMETAL_TD-0341_4P_BLACK [mm]
  rect 1.52x2.16 smd mask+0.05: 1(-2.25,-4.75) 2(-2.25,4.75) 3(2.25,-4.75) 4(2.25,4.75)
  silkscreen extent -3,-3.5 3,3.5, body extent -3,-5.15 3,5.15, height 7.55
SWI_WEALTHMETAL_TD-0341_4P_BLUE [mm]
  rect 1.52x2.16 smd mask+0.05: 1(-2.25,-4.75) 2(-2.25,4.75) 3(2.25,-4.75) 4(2.25,4.75)
  silkscreen extent -3,-3.5 3,3.5, body extent -3,-5.15 3,5.15, height 7.55
TP_SMD_0-3MM [mm]
  round 0.3 smd paste-10 mask+0.05: 1(0,0)
  silkscreen extent -0.3,-0.3 0.3,0.3
TP_SMD_1MM [mm]
  round 1 smd paste-10 mask+0.05: 1(0,0)
  silkscreen extent -0.7,-0.7 0.7,0.7
TRS_COILCRAFT_POE30P-50L [mm]
  rect 2.03x1.27 smd mask+0.05: 1(-5.715,-3.75) 2(-5.715,-1.25) 3(-5.715,1.25) 4(-5.715,3.75) 5(5.715,3.75) 6(5.715,1.25) 7(5.715,-1.25) 8(5.715,-3.75)
  silkscreen extent -4.57,-5.48 4.57,5.48, body extent -6.6,-5.46 6.6,5.46, height 9.02
TRS_PULSE_H2019NL [mm]
  rect 0.64x1.4 smd mask+0.05: 1(-4.445,-4.51) 2(-3.175,-4.51) 3(-1.905,-4.51) 4(-0.635,-4.51) 5(0.635,-4.51) 6(1.905,-4.51) 7(3.175,-4.51) 8(4.445,-4.51) 9(4.445,4.51) 10(3.175,4.51) 11(1.905,4.51) 12(0.635,4.51) 13(-0.635,4.51) 14(-1.905,4.51) 15(-3.175,4.51) 16(-4.445,4.51)
  silkscreen extent -6.35,-3.7 6.35,3.7, body extent -6.35,-4.7 6.35,4.7, height 5.98
TRS_WURTH_750315923 [mm]
  rect 1.63x1.22 smd mask+0.05: 1(-5.79,3) 2(-5.79,1) 3(-5.79,-1) 4(-5.79,-3) 5(5.79,-3) 6(5.79,-1) 7(5.79,1) 8(5.79,3)
  silkscreen extent -4.85,-6.02 4.85,6.02, body extent -6.43,-6.02 6.43,6.02, height 6.11

## Part data
B1: library part MCD-00001, "Non-Open Push-Button 0.1A 24V BLACK", Manufacturer=WEALTHMETAL, Manufacturer_Part_Number=TD-0341, ComponentLink1Description=Datasheet, ComponentLink1URL=http://tunmcdsvn.tun.st.com/Component_Datasheet_Library/Trunk/Misc/Wealthmetal_Tact-Switch_TD0341, Internal_Part_Number=MCD-00001, Part_Type=Misc, Provided_By=SUBCO, Status=Released
B2: library part MCD-00002, "Non-Open Push-Button 0.1A 24V", Manufacturer=WEALTHMETAL, Manufacturer_Part_Number=TD-0341, ComponentLink1Description=Datasheet, ComponentLink1URL=http://tunmcdsvn.tun.st.com/Component_Datasheet_Library/Trunk/Misc/Wealthmetal_Tact-Switch_TD0341, Internal_Part_Number=MCD-00002, Part_Type=Misc, Provided_By=SUBCO, Status=Released
C1 C2 C18: library part MCD-01172, "Capacitor,4.7uF,100V, X7S,20%,1210", Manufacturer=AVX, Manufacturer_Part_Number=12101Z475MAT2A, Package=C1210, ComponentLink1Description=Datasheet, ComponentLink1URL=http://tunmcdsvn.tun.st.com/Component_Datasheet_Library/Trunk/Capacitors/AVX_Capacitor_X7S-Dielectric/AVX_Capacitor_X7S-Dielectric.pdf, Internal_Part_Number=MCD-01172, Part_Type=Capacitor, Provided_By=SUBCO, Status="Footprint available"
C3 C4 C5 C11: library part MCD-00204, "Capacitor, MLCC, 47uF, 10V, X5R, 20%, 0805, T=1,25mm", Manufacturer=MURATA, Manufacturer_Part_Number=GRM21BR61A476ME15K, Package=C0805, ComponentLink1Description=Datasheet, ComponentLink1URL=http://tunmcdsvn.tun.st.com/Component_Datasheet_Library/Trunk/Capacitors/Murata_Capacitor_GR_series, Internal_Part_Number=MCD-00204, Part_Type=Capacitor, Provided_By=SUBCO, Status="Footprint available"
C6 C49: library part MCD-00211, "Capacitor, MLCC, 100nF, 16V, X7R, 10%, 0603, T=0,8mm", Manufacturer=YAGEO, Manufacturer_Part_Number=CC0603KRX7R7BB104, Package=C0603, ComponentLink1Description=Datasheet, ComponentLink1URL=http://tunmcdsvn.tun.st.com/Component_Datasheet_Library/Trunk/Capacitors/Yageo_Multilayer_Capacitor_X7R_series_100pF_to_22uF, Internal_Part_Number=MCD-00211, Part_Type=Capacitor, Provided_By=SUBCO, Status=Released
C7 C9: library part MCD-01093, "Capacitor,100nF,100V,X7R,10%,0805", Manufacturer=TDK, Manufacturer_Part_Number=C2012X7R2A104K125AA, Package=C0805, ComponentLink1Description=Datasheet, ComponentLink1URL=http://tunmcdsvn.tun.st.com/Component_Datasheet_Library/Trunk/Capacitors/TDK_Capacitor_C-series%20Commercial%20Grade%20Mid%20Voltage%20(100%20to%20630V)/TDK_Capacitor_C-series%20Commercial%20Grade%20Mid%20Voltage%20(100%20to%20630V).pdf, Internal_Part_Number=MCD-01093, Part_Type=Capacitor, Provided_By=SUBCO, Status="Footprint available"
C8 C13 C15 C16 C17 C19 C20 C52 C59: library part MCD-01091, "Capacitor,1nF,100V,X7R,10%,0603", Manufacturer=YAGEO, Manufacturer_Part_Number=CC0603KRX7R0BB102, Package=C0603, ComponentLink1Description=Datasheet, ComponentLink1URL=http://tunmcdsvn.tun.st.com/Component_Datasheet_Library/Trunk/Capacitors/Yageo_Multilayer_Capacitor_NPO_X7R_100V_to_630V_0.47pF%20to%202.2uF/Yageo_Multilayer_Capacitor_NPO_X7R_100V_to_630V_0.47pF%20to%202.2uF.pdf, Internal_Part_Number=MCD-01091, Part_Type=Capacitor, Provided_By=SUBCO, Status="Footprint available"
C10 C30: library part MCD-00722, "Capacitor, MLCC, 1nF, 2KV, X7R, 10%, 1206, T=1,25mm", Manufacturer=YAGEO, Manufacturer_Part_Number=CC1206KKX7RDBB102, Package=C1206, ComponentLink1Description=Datasheet, ComponentLink1URL=http://tunmcdsvn.tun.st.com/Component_Datasheet_Library/Trunk/Capacitors/Yageo_Multilayer_Capacitor_NPO_X7R_1KV_to_3KV_10pF_to_33nF/, Internal_Part_Number=MCD-00722, Part_Type=Capacitor, Provided_By=SUBCO, Status=Released
C12: library part MCD-01095, "Capacitor,560pF,16V,X7R,10%,0603", Manufacturer=AVX, Manufacturer_Part_Number=0603YC561KAT2A, Package=C0603, ComponentLink1Description=Datasheet, ComponentLink1URL=http://tunmcdsvn.tun.st.com/Component_Datasheet_Library/Trunk/Capacitors/AVX_Capacitor_X7R-series/AVX_X7R-series.pdf, Internal_Part_Number=MCD-01095, Part_Type=Capacitor, Provided_By=SUBCO, Status="Footprint available"
C14: library part MCD-01096, "Capacitor,27pF,100V,NPO,5%,0603", Manufacturer=YAGEO, Manufacturer_Part_Number=CC0603JRNPO0BN270, Package=C0603, ComponentLink1Description=Datasheet, ComponentLink1URL=http://tunmcdsvn.tun.st.com/Component_Datasheet_Library/Trunk/Capacitors/Yageo_Multilayer_Capacitor_NPO_X7R_100V_to_630V_0.47pF%20to%202.2uF/Yageo_Multilayer_Capacitor_NPO_X7R_100V_to_630V_0.47pF%20to%202.2uF.pdf, Internal_Part_Number=MCD-01096, Part_Type=Capacitor, Provided_By=SUBCO, Status="Footprint available"
C21 C50 C70 C78 C79 C83 C89 C90 C102 C113 C114 C130: library part MCD-00010, "Capacitor, MLCC, 1uF, 16V, X5R, 10%, 0603, T=0,8mm", Manufacturer=YAGEO, Manufacturer_Part_Number=CC0603KRX5R7BB105, Package=C0603, ComponentLink1Description=Datasheet, ComponentLink1URL=http://tunmcdsvn.tun.st.com/Component_Datasheet_Library/Trunk/Capacitors/Yageo_Multilayer_capacitor_X5R_series_100pF_to_100uF, Internal_Part_Number=MCD-00010, Part_Type=Capacitor, Provided_By=SUBCO, Status=Released
C22 C44 C53 C64 C65 C66 C71: library part MCD-00012, "Capacitor, MLCC, 2.2uF, 10V, X5R, 10%, 0603, T=0,8mm", Alternate_Manufacturer=KEMET, Alternate_Manufacturer_Part_Number=C0603C225K8PACTU, Manufacturer=YAGEO, Manufacturer_Part_Number=CC0603KRX5R6BB225, Package=C0603, ComponentLink1Description=Datasheet, ComponentLink1URL=http://tunmcdsvn.tun.st.com/Component_Datasheet_Library/Trunk/Capacitors/Yageo_Multilayer_capacitor_X5R_series_100pF_to_100uF, Internal_Part_Number=MCD-00012, Part_Type=Capacitor, Provided_By=SUBCO, Status=Released
C23 C47 C54 C137: library part MCD-01356, "Capacitor, MLCC, 4.7uF, 6V3, X5R, 20%, 0402, T=0,5mm", Manufacturer=MURATA, Manufacturer_Part_Number=GRM155R60J475ME47, Package=C0402, ComponentLink1Description=Datasheet, ComponentLink1URL=http://tunmcdsvn.tun.st.com/Component_Datasheet_Library/Trunk/Capacitors/Murata_Capacitor_GR_series, Internal_Part_Number=MCD-01356, Part_Type=Capacitor, Provided_By=SUBCO, Status=Released
  C137: ECCN_EU=NEC, ECCN_US=EAR99
C24: library part MCD-01121, "Capacitor, MLCC, 4.7µF, 10V, X5R, 20%, 0603, T=0,8mm", Manufacturer=MURATA, Manufacturer_Part_Number=GRM188R61A475ME15, Package=C0603, ComponentLink1Description=Datasheet, ComponentLink1URL=http://tunmcdsvn.tun.st.com/Component_Datasheet_Library/Trunk/Capacitors/Murata_Capacitor_GR_series, ECCN_EU=NEC, ECCN_US=EAR99, Internal_Part_Number=MCD-01121, Part_Type=Capacitor, Provided_By=SUBCO, Status=Released
C25 C42: library part MCD-01100, "Capacitor,1uF,25V,X5R,10%,0603", Manufacturer=YAGEO, Manufacturer_Part_Number=CC0603KRX5R8BB105, Package=C0603, ComponentLink1Description=Datasheet, ComponentLink1URL=http://tunmcdsvn.tun.st.com/Component_Datasheet_Library/Trunk/Capacitors/Yageo_Multilayer_capacitor_X5R_series_100pF_to_100uF/Yageo_Multilayer_capacitor_X5R_100pF_to_100uF.pdf, Internal_Part_Number=MCD-01100, Part_Type=Capacitor, Provided_By=SUBCO, Status="Footprint available"
C26: library part MCD-00614, "Capacitor, MLCC, 22uF, 16V, 1210, X7R, 20%, T=2,5mm, ESR 2mohm@410KHz", Manufacturer=MURATA, Manufacturer_Part_Number=GCM32ER71C226ME19, Package=C1210, ComponentLink1Description=Datasheet, ComponentLink1URL=http://tunmcdsvn.tun.st.com/Component_Datasheet_Library/Trunk/Capacitors/Murata_Capacitor_GC_series, Internal_Part_Number=MCD-00614, Part_Type=Capacitor, Provided_By=SUBCO, Status=Checked
C27: library part MCD-01101, "Capacitor,100pF,50V,X7R,10%,0603", Manufacturer=AVX, Manufacturer_Part_Number=06035C101JAT4A, Package=C0603, ComponentLink1Description=Datasheet, ComponentLink1URL=http://tunmcdsvn.tun.st.com/Component_Datasheet_Library/Trunk/Capacitors/AVX_Capacitor_X7R-series/AVX_X7R-series.pdf, Internal_Part_Number=MCD-01101, Part_Type=Capacitor, Provided_By=SUBCO, Status="Footprint available"
C28 C40 C41 C57: library part MCD-01099, "Capacitor,100nF,50V,X7R,10%,0603", Manufacturer=YAGEO, Manufacturer_Part_Number=CC0603KRX7R9BB104, Package=C0603, ComponentLink1Description=Datasheet, ComponentLink1URL=http://tunmcdsvn.tun.st.com/Component_Datasheet_Library/Trunk/Capacitors/Yageo_Multilayer_Capacitor_X7R_series_100pF_to_22uF/Yageo_Mutilayer_Capacitor_X7R_100pF_to_22uF.pdf, Internal_Part_Number=MCD-01099, Part_Type=Capacitor, Provided_By=SUBCO, Status="Footprint available"
C29 C33: library part MCD-01103, "Capacitor,22nF,50V,X7R,10%,0603", Manufacturer=YAGEO, Manufacturer_Part_Number=CC0603KRX7R9BB223, Package=C0603, ComponentLink1Description=Datasheet, ComponentLink1URL=http://tunmcdsvn.tun.st.com/Component_Datasheet_Library/Trunk/Capacitors/Yageo_Multilayer_Capacitor_X7R_series_100pF_to_22uF/Yageo_Mutilayer_Capacitor_X7R_100pF_to_22uF.pdf, Internal_Part_Number=MCD-01103, Part_Type=Capacitor, Provided_By=SUBCO, Status="Footprint available"
C31: library part MCD-01102, "Capacitor,10nF,50V,X7R,10%,0603", Manufacturer=YAGEO, Manufacturer_Part_Number=CC0603KRX7R9BB103, Package=C0603, ComponentLink1Description=Datasheet, ComponentLink1URL=http://tunmcdsvn.tun.st.com/Component_Datasheet_Library/Trunk/Capacitors/Yageo_Multilayer_Capacitor_X7R_series_100pF_to_22uF/Yageo_Mutilayer_Capacitor_X7R_100pF_to_22uF.pdf, Internal_Part_Number=MCD-01102, Part_Type=Capacitor, Provided_By=SUBCO, Status="Footprint available"
C32 C34 C36 C37 C46 C55 C61 C62 C63 C68 C69 C75 C77 C81 C82 C86 C95 C98 C99 C100 C103 C104 C105 C106 C108 C109 C110 C111 C121 C122 C124 C125 C126 C127 C128 C129 C131 C132 C133 C134 C135 C136 C138 C139 C140 C141 C143 C144 C145 C146 C147 C148 C149 C150 C151 C152 C153 C154 C155 C156 C157 C158: library part MCD-00102, "Capacitor, MLCC, 100nF, 16V, X7R, 10%, 0402, T=0,5mm", Alternate_Manufacturer=MURATA, Alternate_Manufacturer_Part_Number=GCM155R71C104KA55D, Manufacturer=YAGEO, Manufacturer_Part_Number=CC0402KRX7R7BB104, Package=C0402, ComponentLink1Description=Datasheet, ComponentLink1URL=http://tunmcdsvn.tun.st.com/Component_Datasheet_Library/Trunk/Capacitors/Yageo_Multilayer_Capacitor_X7R_series_100pF_to_22uF, Internal_Part_Number=MCD-00102, Part_Type=Capacitor, Provided_By=SUBCO, Status=Released
  C132 C136 C139 C140 C141 C143: ECCN_EU=NEC, ECCN_US=EAR99
C35: library part MCD-01355, "Capacitor, MLCC, 10uF, 4V, X5R, 20%, 0402, T=0,5mm", Manufacturer=MURATA, Manufacturer_Part_Number=GRM155R60G106ME44, Package=C0402, ComponentLink1Description=Datasheet, ComponentLink1URL=http://tunmcdsvn.tun.st.com/Component_Datasheet_Library/Trunk/Capacitors/Murata_Capacitor_GR_series, Internal_Part_Number=MCD-01355, Part_Type=Capacitor, Provided_By=SUBCO, Status=Released
C38: library part MCD-01341, "Capacitor, MLCC, 10uF, 6V3, X5R, 20%, 0603, T=0,8mm", Manufacturer=MURATA, Manufacturer_Part_Number=GRM188R60J106ME47D, Package=C0603, ComponentLink1Description=Datasheet, ComponentLink1URL=http://tunmcdsvn.tun.st.com/Component_Datasheet_Library/Trunk/Capacitors/Murata_Capacitor_GR_series, Internal_Part_Number=MCD-01341, Part_Type=Capacitor, Provided_By=SUBCO, Status=Released
C39: library part MCD-01104, "Capacitor,470pF,100V,X7R,10%,0603", Manufacturer=AVX, Manufacturer_Part_Number=06031C471KAT2A, Package=C0603, ComponentLink1Description=Datasheet, ComponentLink1URL=http://tunmcdsvn.tun.st.com/Component_Datasheet_Library/Trunk/Capacitors/AVX_Capacitor_X7S-Dielectric/AVX_Capacitor_X7S-Dielectric.pdf, Internal_Part_Number=MCD-01104, Part_Type=Capacitor, Provided_By=SUBCO, Status="Footprint available"
C43: library part MCD-01225, "Capacitor, MLCC, 220pF, 50V, NPO, 5%, 0402, T=0,5mm", Manufacturer=YAGEO, Manufacturer_Part_Number=CC0402JRNPO9BN221, Package=C0402, ComponentLink1Description=Datasheet, ComponentLink1URL=http://tunmcdsvn.tun.st.com/Component_Datasheet_Library/Trunk/Capacitors/Yageo_Capacitor_NP0_16V-to-50V, Internal_Part_Number=MCD-01225, Part_Type=Capacitor, Provided_By=SUBCO, Status=Released
C45 C48: library part MCD-00563, "Capacitor, MLCC, 1.5pF, 50V, NPO, +-0.25pF, 0402, T=0,5mm", Manufacturer=YAGEO, Manufacturer_Part_Number=CC0402CRNPO9BN1R5, Package=C0402, ComponentLink1Description=Datasheet, ComponentLink1URL=http://tunmcdsvn.tun.st.com/Component_Datasheet_Library/Trunk/Capacitors/Yageo_Capacitor_NP0_16V-to-50V, Internal_Part_Number=MCD-00563, Part_Type=Capacitor, Provided_By=SUBCO, Status=Released
C51: library part MCD-00724, "Capacitor, MLCC, 470pF, 50V, NPO, 5%, 0402, T=0,5mm", Manufacturer=YAGEO, Manufacturer_Part_Number=CC0402JRNPO9BN471, Package=C0402, ComponentLink1Description=Datasheet, ComponentLink1URL=http://tunmcdsvn.tun.st.com/Component_Datasheet_Library/Trunk/Capacitors/Yageo_Capacitor_NP0_16V-to-50V, Internal_Part_Number=MCD-00724, Part_Type=Capacitor, Provided_By=SUBCO, Status=Released
C56: library part MCD-01124, "Capacitor, MLCC, 10uF, 10V, X5R, 10%, 0603, T=0.8mm", Manufacturer=MURATA, Manufacturer_Part_Number=GRM188R61A106KAAL, Package=C0603, ComponentLink1Description=Datasheet, ComponentLink1URL=http://tunmcdsvn.tun.st.com/Component_Datasheet_Library/Trunk/Capacitors/Murata_Capacitor_GR_series, ECCN_EU=NEC, ECCN_US=EAR99, Internal_Part_Number=MCD-01124, Part_Type=Capacitor, Provided_By=SUBCO, Status=Released
C58 C60: library part MCD-01098, "Capacitor,10nF,100V,X7R,10%,0603", Manufacturer=YAGEO, Manufacturer_Part_Number=CC0603KRX7R0BB103, Package=C0603, ComponentLink1Description=Datasheet, ComponentLink1URL=http://tunmcdsvn.tun.st.com/Component_Datasheet_Library/Trunk/Capacitors/Yageo_Multilayer_Capacitor_NPO_X7R_100V_to_630V_0.47pF%20to%202.2uF/Yageo_Multilayer_Capacitor_NPO_X7R_100V_to_630V_0.47pF%20to%202.2uF.pdf, Internal_Part_Number=MCD-01098, Part_Type=Capacitor, Provided_By=SUBCO, Status="Footprint available"
C67 C142: library part MCD-00008, "Capacitor, MLCC, 2.2uF, 16V, X7R, 10%, 1206, T=1,15mm", Alternate_Manufacturer=KEMET, Alternate_Manufacturer_Part_Number=C1206C225K4RAC, Manufacturer=YAGEO, Manufacturer_Part_Number=CC1206KKX7R7BB225, Package=C1206, ComponentLink1Description=Datasheet, ComponentLink1URL=http://tunmcdsvn.tun.st.com/Component_Datasheet_Library/Trunk/Capacitors/Yageo_Multilayer_Capacitor_X7R_series_100pF_to_22uF, Internal_Part_Number=MCD-00008, Part_Type=Capacitor, Provided_By=SUBCO, Status=Released
C72: library part MCD-00016, "Capacitor, MLCC, 20pF, 50V, NPO, 5%, 0402, T=0,5mm", Manufacturer=YAGEO, Manufacturer_Part_Number=CC0402JRNPO9BN200, Package=C0402, ComponentLink1Description=Datasheet, ComponentLink1URL=http://tunmcdsvn.tun.st.com/Component_Datasheet_Library/Trunk/Capacitors/Yageo_Capacitor_NP0_16V-to-50V, Internal_Part_Number=MCD-00016, Part_Type=Capacitor, Provided_By=SUBCO, Status=Released
C73: library part MCD-00238, "Capacitor, MLCC, 1uF, 6V3, X5R, 10%, 0603, T=0,8mm", Manufacturer=YAGEO, Manufacturer_Part_Number=CC0603KRX5R5BB105, Package=C0603, ComponentLink1Description=Datasheet, ComponentLink1URL=http://tunmcdsvn.tun.st.com/Component_Datasheet_Library/Trunk/Capacitors/Yageo_Multilayer_capacitor_X5R_series_100pF_to_100uF, Internal_Part_Number=MCD-00238, Part_Type=Capacitor, Provided_By=SUBCO, Status=Released
C74 C80 C84 C88 C91 C92 C101: library part MCD-00009, "Capacitor, MLCC, 4.7uF, 16V, X5R, 10%, 0603, T=0.8mm", Manufacturer=YAGEO, Manufacturer_Part_Number=CC0603KRX5R7BB475, Package=C0603, ComponentLink1Description=Datasheet, ComponentLink1URL=http://tunmcdsvn.tun.st.com/Component_Datasheet_Library/Trunk/Capacitors/Yageo_Multilayer_capacitor_X5R_series_100pF_to_100uF, Internal_Part_Number=MCD-00009, Part_Type=Capacitor, Provided_By=SUBCO, Status=Released
C76 C85: library part MCD-00011, "Capacitor, MLCC, 10nF, 16V, X7R, 10%, 0402, T=0.5mm", Manufacturer=YAGEO, Manufacturer_Part_Number=CC0402KRX7R7BB103, Package=C0402, ComponentLink1Description=Datasheet, ComponentLink1URL=http://tunmcdsvn.tun.st.com/Component_Datasheet_Library/Trunk/Capacitors/Yageo_Multilayer_Capacitor_X7R_series_100pF_to_22uF, Internal_Part_Number=MCD-00011, Part_Type=Capacitor, Provided_By=SUBCO, Status=Released
  C85: ECCN_EU=NEC, ECCN_US=EAR99
C87 C93: library part MCD-00095, "Capacitor, MLCC, 1uF, 6V3, X5R, 10%, 0402, T=0,5mm", Alternate_Manufacturer=MURATA, Alternate_Manufacturer_Part_Number=GRM155R60J105KE19, Manufacturer_Part_Number=GRM155R61E105KA12, Package=C0402, ComponentLink1Description=Datasheet, ComponentLink1URL=http://tunmcdsvn.tun.st.com/Component_Datasheet_Library/Trunk/Capacitors/Murata_Capacitor_GR_series, ECCN_EU=NEC, ECCN_US=EAR99, Internal_Part_Number=MCD-00095, Manufacturer=MURATA, Part_Type=Capacitor, Provided_By=SUBCO, Status=Released
C94 C96 C97 C119 C120: library part MCD-00014, "Capacitor, MLCC, 10uF, 25V, X5R, 10%, 0805, T=0,85mm", Manufacturer=YAGEO, Manufacturer_Part_Number=CC0805KRX5R8BB106, Package=C0805, ComponentLink1Description=Datasheet, ComponentLink1URL=http://tunmcdsvn.tun.st.com/Component_Datasheet_Library/Trunk/Capacitors/Yageo_Multilayer_capacitor_X5R_series_100pF_to_100uF, Internal_Part_Number=MCD-00014, Part_Type=Capacitor, Status=Released
  C94 C96 C97 C120: Provided_By=SUBCO
  C119: ECCN_EU=n/a, ECCN_US=n/a, Initial_Board_Reference=MB1274, Provided_By=Subcon
C107: library part MCD-00097, "Capacitor, MLCC, 4.7uF, 16V, X5R, 20%, 0603, T=0,8mm", Alternate_Manufacturer=Murata, Alternate_Manufacturer_Part_Number=GRM188R61C475MAAJ, Manufacturer=MURATA, Manufacturer_Part_Number=GRM188R61C475KE11, Package=C0603, ComponentLink1Description=Datasheet, ComponentLink1URL=http://tunmcdsvn.tun.st.com/Component_Datasheet_Library/Trunk/Capacitors/Murata_Capacitor_GR_series, ECCN_EU=NEC, ECCN_US=EAR99, Internal_Part_Number=MCD-00097, Part_Type=Capacitor, Provided_By=SUBCO, Status=Released
C112: library part MCD-00595, "Capacitor, Tantalum, 4.7uF, 16V, +/-10%, 595D case A", Manufacturer=VISHAY, Manufacturer_Part_Number=595D475X9016A2T, ComponentLink1Description=Datasheet, ComponentLink1URL=http://tunmcdsvn.tun.st.com/Component_Datasheet_Library/Trunk/Capacitors/VISHAY_CAPACITOR_TANTALUM_595D, Internal_Part_Number=MCD-00595, Order_Code_Digikey=595D475X9016A2T-ND, Order_Code_Farnell=1166805, Order_Code_RS=117-303, Part_Type=Capacitor, Provided_By=SUBCO, Revision="July-2002: Re-released for DXP Platform.", Status="Footprint available"
C115: library part MCD-00205, "Capacitor, MLCC, 100pF, 50V, NPO, 5%, 0402, T=0,5mm", Manufacturer=YAGEO, Manufacturer_Part_Number=CC0402JRNPO9BN101, Package=C0402, ComponentLink1Description=Datasheet, ComponentLink1URL=http://tunmcdsvn.tun.st.com/Component_Datasheet_Library/Trunk/Capacitors/Yageo_Capacitor_NP0_16V-to-50V, Internal_Part_Number=MCD-00205, Part_Type=Capacitor, Provided_By=SUBCO, Status=Released
C116 C117 C118: library part MCD-00006, "Capacitor, MLCC, 100nF, 16V, X7R, 10%, 0402, T=0.5mm", Manufacturer=YAGEO, Manufacturer_Part_Number=CC0402KRX7R7BB104, Package=C0402, ComponentLink1Description=Datasheet, ComponentLink1URL=http://tunmcdsvn.tun.st.com/Component_Datasheet_Library/Trunk/Capacitors/Yageo_Multilayer_Capacitor_X7R_series_100pF_to_22uF, ECCN_EU=n/a, ECCN_US=n/a, Initial_Board_Reference=MB1274, Internal_Part_Number=MCD-00006, Part_Type=Capacitor, Provided_By=Subcon, Status=Released
C123: library part MCD-01722, "Capacitor, 1uF, 10V, X5R, 10%, 0402, T=0.5mm", Manufacturer=YAGEO, Manufacturer_Part_Number=CC0402KRX5R6BB105, Package=C0402, ComponentLink1Description=Datasheet, ComponentLink1URL=http://tunmcdsvn.tun.st.com/Component_Datasheet_Library/Trunk/Capacitors/Yageo_Multilayer_capacitor_X5R_series_100pF_to_100uF/Yageo_Multilayer_capacitor_X5R_100pF_to_100uF.pdf, ECCN_EU=N/A, ECCN_US=N/A, Internal_Part_Number=MCD-01722, Part_Type=Capacitor, Provided_By=SUBCO, Status=Released
CN1: library part MCD-00279, "RF SMA connector PCB edge", Manufacturer=SAMTEC, ComponentLink1Description=Datasheet, ComponentLink1URL=http://tunmcdsvn.tun.st.com/Component_Datasheet_Library/Trunk/Connectors/Samtec_sma_SMA_series, ECCN_EU=NEC, ECCN_US=EAR99, Internal_Part_Number=MCD-00279, Manufacturer_Part_Number=SMA-J-P-H-ST-EM1, Part_Type=Connector, Provided_By=SUBCO, Status=Released
CN2: library part MCD-00023, "MicroSD Card Conn, Reversed-Type, Mnt Push-Push, Positionning holes", Manufacturer=YAMAICHI, Manufacturer_Part_Number=PJS008-2003-1, ComponentLink1Description=Datasheet, ComponentLink1URL=http://tunmcdsvn.tun.st.com/Component_Datasheet_Library/Trunk/Connectors/Yamaichi_Connector_microSD-Card-PJS008-2003, ECCN_EU=n/a, ECCN_US=n/a, Internal_Part_Number=MCD-00023, Part_Type=Connector, Provided_By=SUBCO, Status=Released
CN3: library part MCD-00717, "RJ45 jack, single port, with LEDS, Metal shielded dip low profile", Manufacturer="DONGGUAN KEYOUDA ELECTRONIC TECHNOLOGY", Manufacturer_Part_Number=KRJ-CB4.2GYZNL, ComponentLink1Description=Datasheet, ComponentLink1URL=http://tunmcdsvn.tun.st.com/Component_Datasheet_Library/Trunk/Connectors/DGKYD_RJ45_KRJ-CB4.2GYZNL, Internal_Part_Number=MCD-00717, Part_Type=Connector, Provided_By=SUBCO, Status=Released
CN4: library part MCD-00301, "Socket, 10x1, 2.54mm, VR, SMT, Height 9.78mm", Manufacturer=SAMTEC, Manufacturer_Part_Number=SSW-110-22-L-S-VS, ComponentLink1Description=Datasheet, ComponentLink1URL=http://tunmcdsvn.tun.st.com/Component_Datasheet_Library/Trunk/Connectors/Samtec_SSW_smt_series, Internal_Part_Number=MCD-00301, Part_Type=Connector, Provided_By=SUBCO, Status=Checked
CN5 CN8: library part MCD-00300, "Socket, 8x1, 2.54mm, VR, SMT, Height 9.78mm", Manufacturer=SAMTEC, Manufacturer_Part_Number=SSW-108-22-L-S-VS, ComponentLink1Description=Datasheet, ComponentLink1URL=http://tunmcdsvn.tun.st.com/Component_Datasheet_Library/Trunk/Connectors/Samtec_SSW_smt_series, Internal_Part_Number=MCD-00300, Part_Type=Connector, Provided_By=SUBCO, Status=Checked
CN6: library part MCD-00029, "Header, 4x1, 2,54mm, VR, TH, Height 5.84mm/2.54mm", Manufacturer=SAMTEC, Manufacturer_Part_Number=TSW-104-07-x-S, ComponentLink1Description=Datasheet, ComponentLink1URL=http://tunmcdsvn.tun.st.com/Component_Datasheet_Library/Trunk/Connectors/Samtec_TSW-HTSW-series, Internal_Part_Number=MCD-00029, Part_Type=Connector, Provided_By=SUBCO, Status=Released
CN7: library part MCD-01226, "Header 5x2, 1.27mm, Dual row, Straight, Surface mount, vertical male connector. 3.05mm lead. Mates with FFSD connector. Footprint compatible with FTSH-107-01-L-DV,-K,-A,-P,-ES (STDC14 MEDIUM)", Alternate_Manufacturer=JIUBABA, Alternate_Manufacturer_Part_Number=P127B-2x05MGF-079-1A, Manufacturer=SAMTEC, Manufacturer_Part_Number=FTSH-105-01-L-DV-K, ComponentLink1Description=Datasheet, ComponentLink1URL=http://tunmcdsvn.tun.st.com/Component_Datasheet_Library/Trunk/Connectors/Samtec_FTSH_smt_series, ECCN_EU=n/a, ECCN_US=n/a, Internal_Part_Number=MCD-01226, Part_Type=Connector, Provided_By=SUBCO, Status=Released
CN9: library part MCD-00299, "Socket, 6x1, 2.54mm, VR, SMT, Height 9.78mm", Manufacturer=SAMTEC, Manufacturer_Part_Number=SSW-106-22-L-S-VS, ComponentLink1Description=Datasheet, ComponentLink1URL=http://tunmcdsvn.tun.st.com/Component_Datasheet_Library/Trunk/Connectors/Samtec_SSW_smt_series, Internal_Part_Number=MCD-00299, Part_Type=Connector, Provided_By=SUBCO, Status=Checked
CN10: library part MCD-00018, "Connector Jack socket Stereo 3.5mm, 3 pins, RA, SMT, Green (Line output)", Alternate_Manufacturer=QIAOD, Alternate_Manufacturer_Part_Number=PJ30280-3_GR, Manufacturer_Part_Number=PJ3028B-3_GR, ComponentLink1Description=Datasheet, ComponentLink1URL=http://tunmcdsvn.tun.st.com/Component_Datasheet_Library/Trunk/Connectors/QIAOD_PJ-3028B-3-XX, Internal_Part_Number=MCD-00018, Manufacturer=QIAOD, Part_Type=Connector, Provided_By=SUBCO, Status=Released
CN11: library part MCD-00682, "Connector Jack socket Stereo 3.5mm, 3 pins, RA, SMT, Blue (Line input)", Alternate_Manufacturer=QIAOD, Alternate_Manufacturer_Part_Number=PJ30280-3_BE, Manufacturer_Part_Number=PJ3028B-3_BE, ComponentLink1Description=Datasheet, ComponentLink1URL=http://tunmcdsvn.tun.st.com/Component_Datasheet_Library/Trunk/Connectors/QIAOD_PJ-3028B-3-XX, Internal_Part_Number=MCD-00682, Manufacturer=QIAOD, Part_Type=Connector, Provided_By=SUBCO, Status="Footprint available"
CN12 CN13 JP2 JP3 JP4 JP5 JP6: library part MCD-00045, "Header, 2x1, 2,54mm, VR, TH, Height 5.84mm/2.54mm", Alternate_Manufacturer=JIUBABA, Alternate_Manufacturer_Part_Number=313102S111116, Manufacturer=SAMTEC, Manufacturer_Part_Number=TSW-102-07-x-S, ComponentLink1Description=Datasheet, ComponentLink1URL=http://tunmcdsvn.tun.st.com/Component_Datasheet_Library/Trunk/Connectors/Samtec_TSW-HTSW-series, Internal_Part_Number=MCD-00045, Part_Type=Connector, Provided_By=SUBCO, Status=Released
CN14: library part MCD-00022, "USB-MICRO-AB, 0.65mm, RA, SMT, Top Mount (compatible with MCD-00661 USB certified)", Alternate_Manufacturer=HIROSE, Alternate_Manufacturer_Part_Number=ZX62RD-AB-5P8(30), Manufacturer=MOLEX, Manufacturer_Part_Number=47590-0001, ComponentLink1Description=Datasheet, ComponentLink1URL=http://tunmcdsvn.tun.st.com/Component_Datasheet_Library/Trunk/Connectors/Molex_Connector-USB-microAB_47590-0001, Internal_Part_Number=MCD-00022, Part_Type=Connector, Provided_By=SUBCO, Status=Released
CN15: library part MCD-00028, "USB-MICRO-B, 0.65mm, RA, SMT, Bottom Mount,", Manufacturer=MOLEX, Manufacturer_Part_Number=1050170001, ComponentLink1Description=Datasheet, ComponentLink1URL=http://tunmcdsvn.tun.st.com/Component_Datasheet_Library/Trunk/Connectors/Molex_Connector-USB-microB_105017-0001, Internal_Part_Number=MCD-00028, Part_Type=Connector, Provided_By=SUBCO, Status=Released
CN16 CN17 CN18: library part MCD-00314, "Header, 2x1, 2.54mm, VR, TH, Height 6mm/3mm", Manufacturer=JIUBABA, Manufacturer_Part_Number=PHFS25-11-02-G0B115-T-1, ComponentLink1Description=Datasheet, ComponentLink1URL=http://tunmcdsvn.tun.st.com/Component_Datasheet_Library/Trunk/Connectors/Jiubaba_PHFS25_11XXXXXXXXXX, Internal_Part_Number=MCD-00314, Part_Type=Connector, Provided_By=SUBCO, Status=Released
CN19: library part MCD-01222, "Header 25x2 for MB1046 - LCD 4.3 inches daughter board", Manufacturer=SAMTEC, Manufacturer_Part_Number=FLE-125-01-G-DV, ComponentLink1Description=Datasheet, ComponentLink1URL=http://tunmcdsvn.tun.st.com/Component_Datasheet_Library/Trunk/Connectors/Samtec_FLE_smt_series/, Initial_Board_Reference=MB1332, Internal_Part_Number=MCD-01222, Part_Type=Connector, Provided_By=SUBCO, Status="Footprint available"
CN20: library part MCD-00147, "Socket for MB1299, 10x2, 1.27mm, VR, TH, Height 4.30mm/2.40mm", Alternate_Manufacturer=JIUBABA, Alternate_Manufacturer_Part_Number=234220S1410, Manufacturer=FCI, Manufacturer_Part_Number=20021311-00020T4LF, ComponentLink1Description=Datasheet, ComponentLink1URL=http://tunmcdsvn.tun.st.com/Component_Datasheet_Library/Trunk/Connectors/FCI_Minitek127_Catalog, Internal_Part_Number=MCD-00147, Part_Type=Connector, Provided_By=SUBCO, Status=Released
CN21: library part MCD-00031, "Tag_Connector Header, 10x2, No legs", Manufacturer="TAG-CONNECT LLC", Manufacturer_Part_Number=TC2050-IDC-NL-FP, ComponentLink1Description=Datasheet, ComponentLink1URL=http://tunmcdsvn.tun.st.com/Component_Datasheet_Library/Trunk/Connectors/TAG_Connector_TC2050-IDC-NLFP, Internal_Part_Number=MCD-00031, Part_Type=Connector, Provided_By=SUBCO, Status=Released
D1: library part MCD-01083, "Transil 400W, VRM=58V", Manufacturer=STMICROELECTRONICS, Package=SMA, BMS_Part_Number=9151124, ComponentLink1Description=Datasheet, ComponentLink1URL=http://tunmcdsvn.tun.st.com/Component_Datasheet_Library/Trunk/Diodes/STM_Diode_SMAJ58A-TR/STM_Diode_SMAJ58A-TR.pdf, Internal_Part_Number=MCD-01083, Manufacturer_Part_Number=SMAJ58A-TR, Part_Type=Diode, Provided_By="SUBCO with ST control", Status="Footprint available"
D2: library part MCD-01087, "Low drop power Schottky rectifier(2A, 40V, 0.34V)", Manufacturer=STMICROELECTRONICS, Package=SMBflat, BMS_Part_Number=9151009, ComponentLink1Description=Datasheet, ComponentLink1URL=http://tunmcdsvn.tun.st.com/Component_Datasheet_Library/Trunk/Diodes/STM_Schottky_STPS2L40UF/STM_Schottky_STPS2L40UF.pdf, Internal_Part_Number=MCD-01087, Manufacturer_Part_Number=STPS2L40UF, Part_Type=Diode, Provided_By="SUBCO with ST control", Status="Footprint available"
D3 D6: library part MCD-01064, "Schottky Single diode,150mA, 100V", Manufacturer=STMICROELECTRONICS, Manufacturer_Part_Number=BAT46JFILM, Package=SOD-323, BMS_Part_Number=9151125, ComponentLink1Description=Datasheet, ComponentLink1URL=http://tunmcdsvn.tun.st.com/Component_Datasheet_Library/Trunk/Diodes/STM_Diode_BAT60JFILM-SOD323/STM_Diode_BAT60JFILM-SOD323.pdf, Internal_Part_Number=MCD-01064, Part_Type=Diode, Provided_By="SUBCO with ST control", Status="Footprint available"
D4 D5: library part MCD-01065, "Surface Mount Bridge Rectifiers", Manufacturer=VISHAY, Package=DFS, ComponentLink1Description=Datasheet, ComponentLink1URL=http://tunmcdsvn.tun.st.com/Component_Datasheet_Library/Trunk/IC/Vishay_Rectifiers_DF01S/Vishay_Rectifiers_DF01S.pdf, Internal_Part_Number=MCD-01065, Manufacturer_Part_Number=DF01S, Part_Type=IC, Provided_By=SUBCO, Status="Footprint available"
D7: library part MCD-01165, "High voltage power Schottky rectifier", Manufacturer=STMICROELECTRONICS, Manufacturer_Part_Number=STPS1H100A, BMS_Part_Number=9151102, ComponentLink1Description=Datasheet, ComponentLink1URL=http://tunmcdsvn.tun.st.com/Component_Datasheet_Library/Trunk/Diodes/STM_SCHOTTKY_STPS1H100A/STM_SCHOTTKY_STPS1H100A.pdf, Internal_Part_Number=MCD-01165, Part_Type=Diode, Provided_By="SUBCO with ST control", Status="Footprint available"